# Altium PCB HackCube 2.PcbDoc
Units mm, origin at the board's own origin, x right, y up, seen from the top; angles counter-clockwise.
Board outline 30.4 x 57 mm, 2 copper layers (Top Layer, Bottom Layer); 7 components, 15 nets, 87 pads, 5 vias.
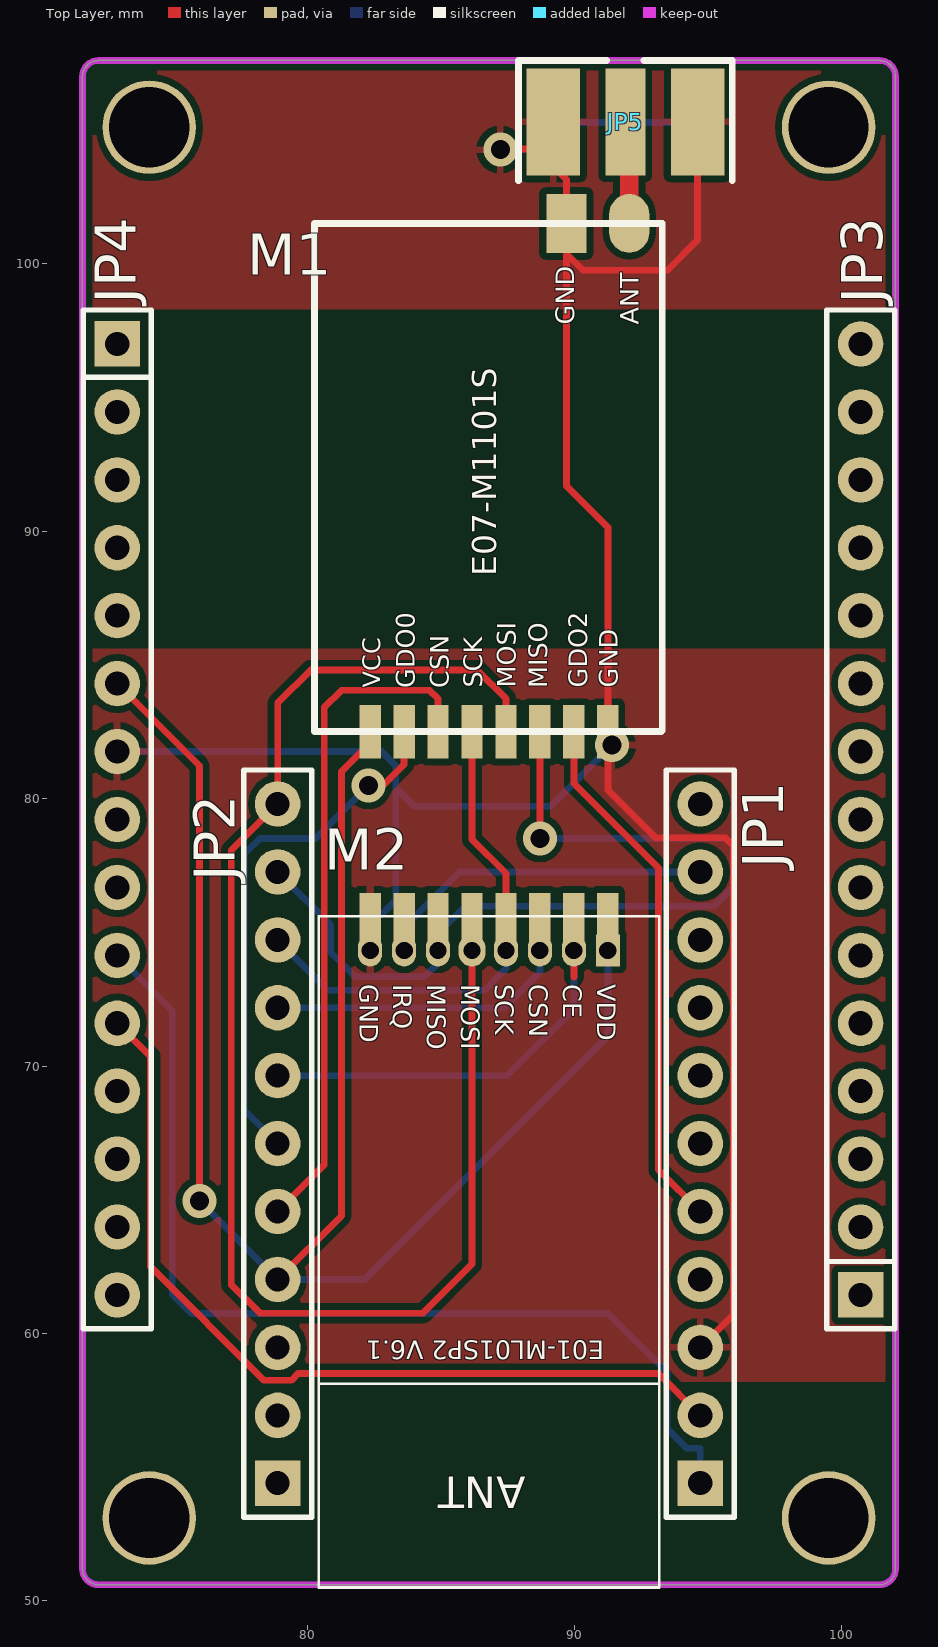
[diagram p0: Top Layer view]
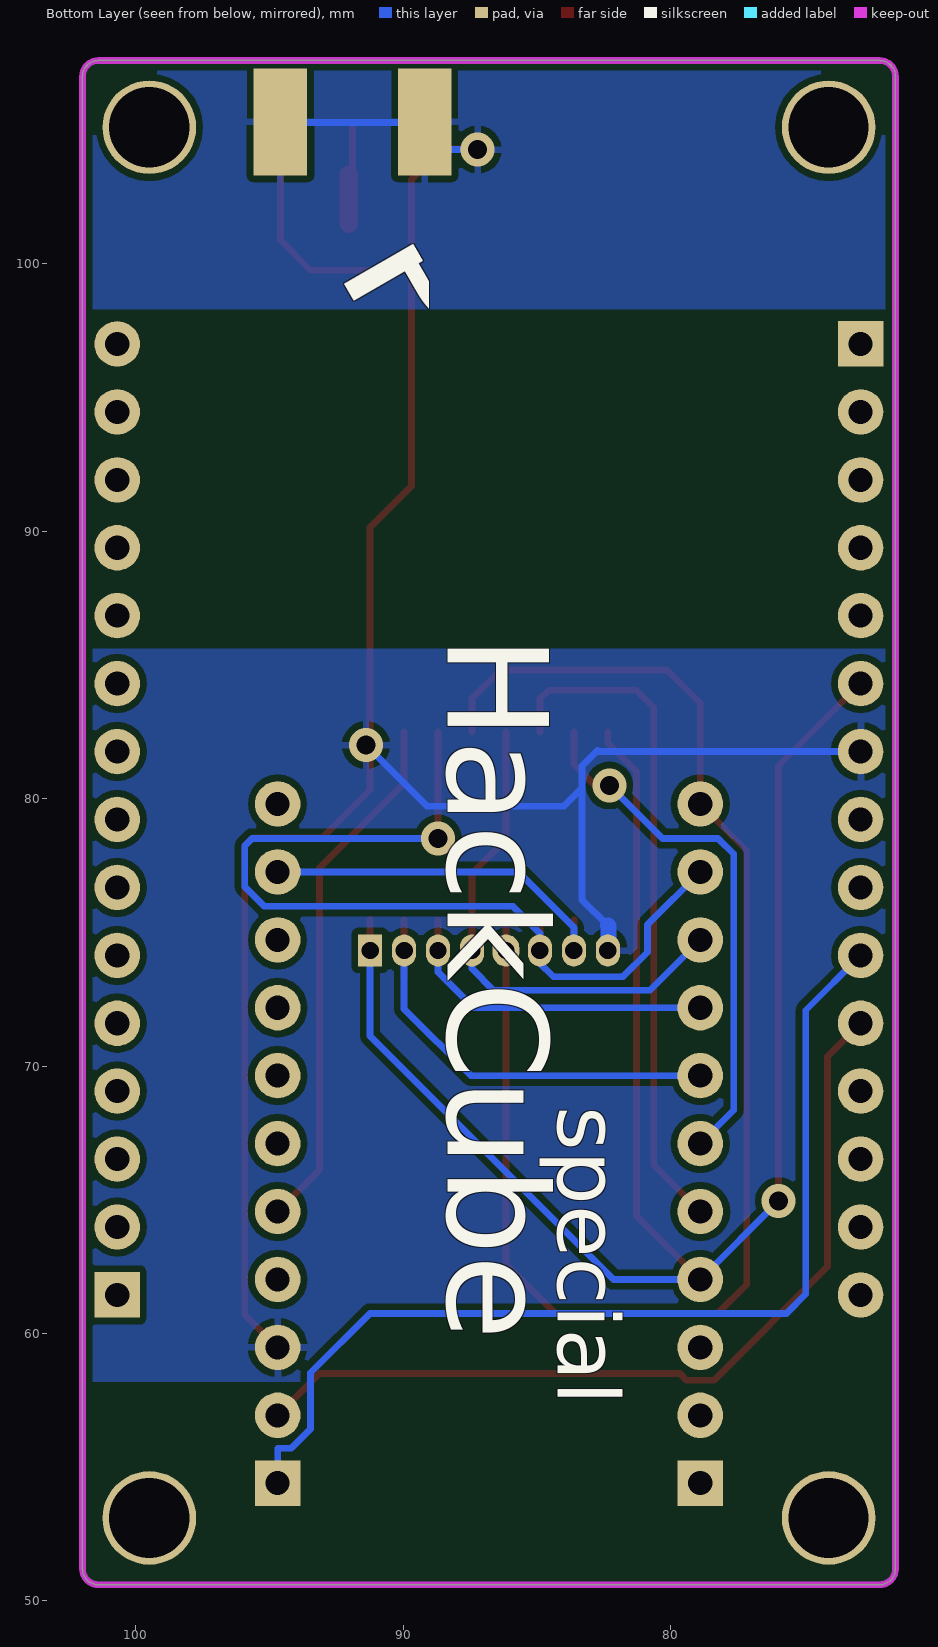
[diagram p1: Bottom Layer view, seen from below]

## Layer stack, top to bottom
Top Solder: solder mask 0.0102, Solder Resist, Dk 3.5
Top Layer: signal copper 0.0356
Dielectric 1: dielectric 0.32, FR-4, Dk 4.8
Bottom Layer: signal copper 0.0356
Bottom Solder: solder mask 0.0102, Solder Resist, Dk 3.5

## Board outline
71.6,51.2 71.6,107 cw(c72.2,107) 72.2,107.6 101.4,107.6 cw(c101.4,107) 102,107 102,51.2 cw(c101.4,51.2) 101.4,50.6 72.2,50.6 cw(c72.2,51.2)

## Design rules (kind name [scope] priority, off if disabled: settings)
Clearance [All] p1: gap=0.254 ignorepadtopadclearanceinfootprint=FALSE except(0: Arc-Hole Track-Hole SMDPad-Hole THPad-Hole Via-Hole Fill-Hole Poly-Hole Region-Hole Text-Hole)
PolygonConnect [All] p1: connectstyle=Relief reliefconductorwidth=0.254 reliefentries=4 polygonreliefangle="90 Angle" airgapwidth=0.254
RoutingVias [All] p1: holewidth=0.711 width=1.27 viastyle="Through Hole" minholewidth=0.711 minwidth=1.27 maxholewidth=0.711 maxwidth=1.27
SolderMaskExpansion [All] p1: expansion=0.102
Width [All] p1: maxlimit=0.254 minlimit=0.254 preferedwidth=0.254
30 further rules are at their usual default settings.

## Components (designator, comment, footprint, x,y, rotation, side; value= is the part's Value field where it differs from the comment)
JP1 "HDR-1X11" HDR2.54-LI-11P 94.7,67.1 r90 top
JP2 "HDR-1X11" HDR2.54-LI-11P 78.9,67.1 r90 top
JP3 "HDR-1X15" HDR2.54-LI-15P 100.7,79.22 r90 top
JP4 "HDR-1X15" HDR2.54-LI-15P 72.9,79.22 r270 top
JP5 "SMA WIFI 天线接口" SMA-KE 91.9,105.3 r0 top
M1 "CC1101_433Mhz" PE07-M1101S 87.2,92 r90 top
M2 "nRF24L01_2_4G" PE01-ML01SP2 86.8,67.6 r270 top

## Footprints (in the part's own frame and the unit in brackets; to place one, negate y for a bottom-side part, rotate by r counter-clockwise, add the part's x,y. Pads: shape width x height; smd on the part's side, far side on the other; paste and mask are expansions set on the pad)
HDR2.54-LI-11P [mm] "排针"
  rect 1.7x1.7 hole 0.9: 1(-12.7,0)
  round 1.7 hole 0.9: 2(-10.16,0) 3(-7.62,0) 4(-5.08,0) 5(-2.54,0) 6(0,0) 7(2.54,0) 8(5.08,0) 9(7.62,0) 10(10.16,0) 11(12.7,0)
  silkscreen extent -13.97,-1.27 13.97,1.27, body extent -13.97,-1.27 13.97,1.27, height 8.5
HDR2.54-LI-15P [mm] "排针，15脚"
  rect 1.7x1.7 hole 0.9: 1(-17.78,0)
  round 1.7 hole 0.9: 2(-15.24,0) 3(-12.7,0) 4(-10.16,0) 5(-7.62,0) 6(-5.08,0) 7(-2.54,0) 8(0,0) 9(2.54,0) 10(5.08,0) 11(7.62,0) 12(10.16,0) 13(12.7,0) 14(15.24,0) 15(17.78,0)
  silkscreen extent -19.05,-1.27 19.05,1.27, body extent -19.05,-1.27 19.05,1.27, height 8.5
PE01-ML01SP2 [mm] "25.1mm*12.8mm*2.10mm-S"
  rect 2x0.8 smd: 1(-7.874,4.445) 2(-7.873,3.175) 3(-7.873,1.905) 4(-7.873,0.635) 5(-7.873,-0.635) 6(-7.873,-1.905) 7(-7.873,-3.175) 8(-7.873,-4.445)
  rect 1.2x0.9 hole 0.65: 1(-6.721,4.445)
  oval 1.2x0.9 hole 0.65: 2(-6.721,3.175) 3(-6.721,1.905) 4(-6.721,0.635) 6(-6.721,-1.905) 7(-6.721,-3.175) 8(-6.721,-4.445)
  oval 1.2x1 hole 0.65: 5(-6.721,-0.635)
  Top Layer lines w0.22: -6.327,-0.472 cw(c-6.721,-0.077) -6.721,-0.635 ; -6.329,3.175 -6.404,3.175 ; -6.721,-0.635 ccw(c-6.748,-0.608) -6.72,-0.634 ; -6.721,-0.635 ccw(c-6.748,-0.608) -6.72,-0.634 ; -6.721,-0.635 ccw(c-6.748,-0.608) -6.72,-0.634 ; -6.721,-0.635 ccw(c-6.748,-0.608) -6.72,-0.634 ; -6.721,-0.635 ccw(c-6.748,-0.608) -6.72,-0.634 ; -6.721,-0.635 ccw(c-6.748,-0.608) -6.72,-0.634 ; -6.721,-0.635 ccw(c-6.748,-0.608) -6.72,-0.634 ; -6.721,-0.635 ccw(c-6.748,-0.608) -6.72,-0.634 ; -6.721,-0.635 ccw(c-6.748,-0.608) -6.72,-0.634 ; -6.721,-0.635 ccw(c-6.748,-0.608) -6.72,-0.634 ; -6.721,-0.635 ccw(c-6.748,-0.608) -6.72,-0.634 ; -6.721,-0.635 ccw(c-6.748,-0.608) -6.72,-0.634 ; -6.721,-0.635 ccw(c-6.748,-0.608) -6.72,-0.634 ; -6.721,-0.635 ccw(c-6.748,-0.608) -6.72,-0.634 ; -6.721,-0.635 ccw(c-6.748,-0.608) -6.72,-0.634 ; -6.721,-0.635 ccw(c-6.748,-0.608) -6.72,-0.634 ; -6.721,-0.635 ccw(c-6.748,-0.608) -6.72,-0.634 ; -6.721,-0.635 ccw(c-6.748,-0.608) -6.72,-0.634 ; -6.721,-0.635 ccw(c-6.748,-0.608) -6.72,-0.634 ; -6.721,-0.635 ccw(c-6.748,-0.608) -6.72,-0.634 ; -6.721,-0.635 ccw(c-6.748,-0.608) -6.72,-0.634 ; -6.721,-0.635 ccw(c-6.748,-0.608) -6.72,-0.634 ; -6.721,-0.635 ccw(c-6.748,-0.608) -6.72,-0.634 ; -6.721,-0.635 ccw(c-6.748,-0.608) -6.72,-0.634 ; -6.721,-0.635 ccw(c-6.748,-0.608) -6.72,-0.634 ; -6.721,-0.635 ccw(c-6.748,-0.608) -6.72,-0.634 ; -6.721,-0.635 ccw(c-6.748,-0.608) -6.72,-0.634 ; -6.721,-0.635 ccw(c-6.748,-0.608) -6.72,-0.634 ; -6.721,-0.635 ccw(c-6.748,-0.608) -6.72,-0.634 ; -6.721,-0.635 ccw(c-6.748,-0.608) -6.72,-0.634 ; -6.721,-0.635 ccw(c-6.748,-0.608) -6.72,-0.634 ; -6.721,-0.635 ccw(c-6.748,-0.608) -6.72,-0.634 ; -6.721,-0.635 -6.72,-0.634 ; -6.721,-0.635 -6.72,-0.634 ; -6.721,-0.635 -6.72,-0.634 ; -6.721,-0.635 -6.72,-0.634 ; -6.721,-0.635 -6.72,-0.634 ; -6.721,-0.635 -6.72,-0.634 ; -6.721,-0.635 -6.72,-0.634 ; -6.721,-0.635 -6.72,-0.634 ; -6.721,-0.635 -6.72,-0.634 ; -6.721,-0.635 -6.72,-0.634 ; -6.721,-0.635 -6.72,-0.634 ; -6.721,-0.635 -6.72,-0.634 ; -6.721,-0.635 -6.72,-0.634 ; -6.721,-0.635 -6.72,-0.634 ; -6.721,-0.635 -6.72,-0.634 ; -6.721,-0.635 -6.72,-0.634 ; -6.72,-0.634 ccw(c-6.748,-0.608) -6.71,-0.608 ; -6.72,-0.634 ccw(c-6.748,-0.608) -6.71,-0.608 ; -6.72,-0.634 ccw(c-6.748,-0.608) -6.71,-0.608 ; -6.72,-0.634 ccw(c-6.748,-0.608) -6.71,-0.608 ; -6.72,-0.634 ccw(c-6.748,-0.608) -6.71,-0.608 ; -6.72,-0.634 ccw(c-6.748,-0.608) -6.71,-0.608 ; -6.72,-0.634 ccw(c-6.748,-0.608) -6.71,-0.608 ; -6.72,-0.634 ccw(c-6.748,-0.608) -6.71,-0.608 ; -6.72,-0.634 ccw(c-6.748,-0.608) -6.71,-0.608 ; -6.72,-0.634 ccw(c-6.748,-0.608) -6.71,-0.608 ; -6.72,-0.634 ccw(c-6.748,-0.608) -6.71,-0.608 ; -6.72,-0.634 ccw(c-6.748,-0.608) -6.71,-0.608 ; -6.72,-0.634 ccw(c-6.748,-0.608) -6.71,-0.608 ; -6.72,-0.634 ccw(c-6.748,-0.608) -6.71,-0.608 ; -6.72,-0.634 ccw(c-6.748,-0.608) -6.71,-0.608 ; -6.72,-0.634 ccw(c-6.748,-0.608) -6.71,-0.608 ; -6.72,-0.634 ccw(c-6.748,-0.608) -6.71,-0.608 ; -6.72,-0.634 ccw(c-6.748,-0.608) -6.71,-0.608 ; -6.72,-0.634 ccw(c-6.748,-0.608) -6.71,-0.608 ; -6.72,-0.634 ccw(c-6.748,-0.608) -6.71,-0.608 ; -6.72,-0.634 ccw(c-6.748,-0.608) -6.71,-0.608 ; -6.72,-0.634 ccw(c-6.748,-0.608) -6.71,-0.608 ; -6.72,-0.634 ccw(c-6.748,-0.608) -6.71,-0.608 ; -6.72,-0.634 ccw(c-6.748,-0.608) -6.71,-0.608 ; -6.72,-0.634 ccw(c-6.748,-0.608) -6.71,-0.608 ; -6.72,-0.634 ccw(c-6.748,-0.608) -6.71,-0.608 ; -6.72,-0.634 ccw(c-6.748,-0.608) -6.71,-0.608 ; -6.72,-0.634 ccw(c-6.748,-0.608) -6.71,-0.608 ; -6.72,-0.634 ccw(c-6.748,-0.608) -6.71,-0.608 ; -6.72,-0.634 ccw(c-6.748,-0.608) -6.71,-0.608 ; -6.72,-0.634 ccw(c-6.748,-0.608) -6.71,-0.608 ; -6.72,-0.634 ccw(c-6.748,-0.608) -6.71,-0.608 ; -6.72,-0.634 -6.653,-0.567 ; -6.72,-0.634 -6.653,-0.567 ; -6.72,-0.634 -6.653,-0.567 ; -6.72,-0.634 -6.653,-0.567 ; -6.72,-0.634 -6.653,-0.567 ; -6.72,-0.634 -6.653,-0.567 ; -6.72,-0.634 -6.653,-0.567 ; -6.72,-0.634 -6.653,-0.567 ; -6.72,-0.634 -6.653,-0.567 ; -6.72,-0.634 -6.653,-0.567 ; -6.72,-0.634 -6.653,-0.567 ; -6.72,-0.634 -6.653,-0.567 ; -6.72,-0.634 -6.653,-0.567 ; -6.72,-0.634 -6.653,-0.567 ; -6.72,-0.634 -6.653,-0.567 ; -6.72,-0.634 -6.653,-0.567 ; -6.71,-0.608 cw(c-6.662,-0.56) -6.73,-0.56 ; -6.71,-0.608 cw(c-6.662,-0.56) -6.73,-0.56 ; -6.73,-0.56 -6.73,-0.255 -6.73,-0.56 ; -6.721,0.635 cw(c-6.6,0.514) -6.721,0.635 ; -6.721,0.635 cw(c-6.6,0.514) -6.721,0.635 ; -6.721,0.635 cw(c-6.6,0.514) -6.721,0.635 ; -6.721,0.635 cw(c-6.6,0.514) -6.721,0.635 ; -6.721,0.635 cw(c-6.6,0.514) -6.721,0.635 ; -6.721,0.635 cw(c-6.6,0.514) -6.721,0.635 ; -6.721,0.635 cw(c-6.6,0.514) -6.721,0.635 ; -6.721,0.635 cw(c-6.6,0.514) -6.721,0.635 ; -6.721,0.635 cw(c-6.6,0.514) -6.721,0.635 ; -6.721,0.635 cw(c-6.6,0.514) -6.721,0.635 ; -6.721,0.635 cw(c-6.6,0.514) -6.721,0.635 ; -6.721,0.635 cw(c-6.6,0.514) -6.721,0.635 ; -6.721,0.635 cw(c-6.6,0.514) -6.721,0.635 ; -6.721,0.635 cw(c-6.6,0.514) -6.721,0.635 ; -6.721,0.635 cw(c-6.6,0.514) -6.721,0.635 ; -6.721,0.635 cw(c-6.6,0.514) -6.721,0.635 ; -6.721,0.635 -6.721,0.635 ; -6.721,0.635 -6.721,0.635 ; -6.721,0.635 -6.721,0.635 ; -6.721,0.635 -6.721,0.635 ; -6.721,0.635 -6.721,0.635 ; -6.721,0.635 -6.721,0.635 ; -6.721,0.635 -6.721,0.635 ; -6.721,0.635 -6.721,0.635 ; -6.721,0.635 -6.721,0.635 ; -6.721,0.635 -6.721,0.635 ; -6.721,0.635 -6.721,0.635 ; -6.721,0.635 -6.721,0.635 ; -6.721,0.635 -6.721,0.635 ; -6.721,0.635 -6.721,0.635 ; -6.721,0.635 -6.721,0.635 ; -6.721,0.635 -6.721,0.635 ; -6.721,0.635 cw(c-6.6,0.514) -6.6,0.685 ; -6.721,0.635 cw(c-6.6,0.514) -6.6,0.685 ; -6.721,0.635 cw(c-6.6,0.514) -6.6,0.685 ; -6.721,0.635 cw(c-6.6,0.514) -6.6,0.685 ; -6.721,0.635 cw(c-6.6,0.514) -6.6,0.685 ; -6.721,0.635 cw(c-6.6,0.514) -6.6,0.685 ; -6.721,0.635 cw(c-6.6,0.514) -6.6,0.685 ; -6.721,0.635 cw(c-6.6,0.514) -6.6,0.685 ; -6.721,0.635 cw(c-6.6,0.514) -6.6,0.685 ; -6.721,0.635 cw(c-6.6,0.514) -6.6,0.685 ; -6.721,0.635 cw(c-6.6,0.514) -6.6,0.685 ; -6.721,0.635 cw(c-6.6,0.514) -6.6,0.685 ; -6.721,0.635 cw(c-6.6,0.514) -6.6,0.685 ; -6.721,0.635 cw(c-6.6,0.514) -6.6,0.685 ; -6.721,0.635 cw(c-6.6,0.514) -6.6,0.685 ; -6.721,0.635 cw(c-6.6,0.514) -6.6,0.685 ; -6.721,0.635 -6.671,0.685 ; -6.721,0.635 -6.671,0.685 ; -6.721,0.635 -6.671,0.685 ; -6.721,0.635 -6.671,0.685 ; -6.721,0.635 -6.671,0.685 ; -6.721,0.635 -6.671,0.685 ; -6.721,0.635 -6.671,0.685 ; -6.721,0.635 -6.671,0.685 ; -6.721,0.635 -6.671,0.685 ; -6.721,0.635 -6.671,0.685 ; -6.721,0.635 -6.671,0.685 ; -6.721,0.635 -6.671,0.685 ; -6.721,0.635 -6.671,0.685 ; -6.721,0.635 -6.671,0.685 ; -6.721,0.635 -6.671,0.685 ; -6.721,0.635 -6.671,0.685 ; -6.404,3.175 -6.721,3.175 -6.404,3.175
  Bottom Layer lines w0.6: -6.721,-4.445 -6.751,-4.475 -7.62,-4.475 -7.65,-4.445
  silkscreen extent -8,-6.36 17.1,6.37
PE07-M1101S [mm]
  rect 2x0.8 smd: 1(-9.507,4.845) 2(-9.507,3.575) 3(-9.507,2.305) 4(-9.507,1.035) 5(-9.507,-0.235) 6(-9.507,-1.505) 7(-9.507,-2.775) 8(-9.507,-4.045)
  oval 2.2x1.5 smd: 9(9.508,-4.845)
  rect 2.2x1.5 smd: 10(9.508,-2.495)
  silkscreen extent -9.49,-6.08 9.51,6.92
SMA-KE [mm] "SMA 偏脚射频天线座"
  rect 1.5x4 smd: 1(0,0)
  rect 2x4 smd: 2(-2.7,0) 2(2.7,0)
  rect 2x4 smd far side: 3(-2.7,0) 3(2.7,0)
  silkscreen extent -4,-2.2 4,2.3, body extent -3.25,-1.3 3.25,12.2, height 3.75

## Part data
JP1 JP2: library part "Header 11", "11P接插件", BOM名称=11P接插件, 学习资源=www.ooocke.com, 版权归属=源创客
JP3 JP4: library part "Header 15", "15P接插件", BOM名称=15P接插件, 学习资源=www.ooocke.com, 版权归属=源创客
JP5: library part SMA, "SMA-2.4G射频天线接口", BOM名称=SMA-2.4G射频天线接口, 学习资源=www.ooocke.com, 版权归属=源创客

## Free pads (board coordinates)
  round 3.5 hole 3: 12(74.1,105.1) 13(99.5,105.1) 14(74.1,53.1) 15(99.5,53.1)

## Via types
v1: diameter 1.27, hole 0.711, Top Layer to Bottom Layer, 5 vias

## Nets (pads, with @x,y where several pads share a name; then routed paths per layer and width w, separated by ;. In a path a pad name is that pad's centre, name@x,y a point inside that pad or via, vN(x,y) a via of type N, cw(c..) or ccw(c..) an arc to the next point about the centre after c; other vN are vias at no path point)
2_4_CE: JP2.7 M2.2 | length 16.4
  Top Layer w0.254: 89.975,73.33 89.975,73.929 89.975,74.004 89.975,74.321 M2.2@89.975,75.473
  Bottom Layer w0.254: JP2.7 87.479,69.64 89.975,72.136 M2.2@89.975,74.321
2_4_CSN: JP2.8 M2.3 | length 12.3
  Top Layer w0.254: M2.3@88.705,74.321 M2.3@88.705,75.473
  Bottom Layer w0.254: JP2.8 87.376,72.18 88.705,73.509 M2.3@88.705,74.321
2_4_IRQ: JP1.10 M2.7 | length 13.9
  Top Layer w0.254: M2.7@83.625,74.321 M2.7@83.625,75.473
  Bottom Layer w0.254: M2.7@83.625,74.321 83.625,75.184 85.701,77.26 JP1.10
3V3: JP2.4 JP4.6 M1.1 M2.1 | length 67.1
  Top Layer w0.254: JP4.6 75.971,81.229 v1(75.971,64.949) ; JP2.4 81.28,64.4 81.28,81.011 82.355,82.086 M1.1 ; M2.1@91.245,74.321 M2.1@91.245,75.474
  Bottom Layer w0.254: v1(75.971,64.949) JP2.4 82.145,62.02 91.245,71.12 M2.1@91.245,74.321
433_CSN: JP2.5 M1.3 | length 25.5
  Top Layer w0.254: JP2.5 80.639,66.299 80.639,83.408 81.28,84.049 84.582,84.049 84.895,83.735 M1.3
433_GDO0: JP2.6 M1.2 | length 19.9
  Top Layer w0.254: v1(82.296,80.493) 82.838,80.493 83.625,81.28 M1.2
  Bottom Layer w0.254: JP2.6 77.648,68.352 77.648,77.927 78.232,78.511 80.315,78.511 v1(82.296,80.493)
433_GDO2: JP1.5 M1.7 | length 19.9
  Top Layer w0.254: M1.7 89.975,80.569 93.142,77.402 93.142,66.118 JP1.5
GND: JP1.3 JP4.7 JP5.2 JP5.3 M1.8 M1.10 M2.8 | length 97.4
  Top Layer w0.254: v1(87.224,104.267) 87.249,104.292 JP5.2@89.2,104.292 ; JP5.2@89.2,105.3 JP5.2@89.2,104.292 ; JP5.2@94.6,105.3 94.6,100.884 93.472,99.756 90.312,99.756 89.695,100.374 ; JP1.3 95.936,60.716 95.936,78.232 95.631,78.537 93.023,78.537 91.245,80.315 M1.8 91.245,90.143 89.695,91.694 89.695,100.374 ; JP5.2@89.2,104.292 89.2,103.644 89.695,103.149 M1.10 89.695,100.374
  Bottom Layer w0.254: JP4.7 82.7,81.76 ; 82.355,75.25 83.317,76.212 83.317,80.4 ; 82.739,81.799 83.317,81.22 83.317,80.4 ; v1(87.224,104.267) 89.2,104.267 JP5.3@89.2,105.283 ; JP5.3@89.2,105.3 JP5.3@89.2,105.283 ; v1(91.4,82) 89.117,79.717 84,79.717 83.317,80.4 ; JP5.3@94.6,105.3 94.6,105.283 JP5.3@89.2,105.283
LED: JP4.3
MISO: JP2.10 M1.6 M2.6 | length 35.3
  Top Layer w0.254: M2.6@84.895,74.321 M2.6@84.895,75.473 ; v1(88.705,78.511) M1.6
  Bottom Layer w0.254: JP2.10 80.874,75.286 80.874,74.254 81.788,73.34 84.397,73.34 84.895,73.838 84.895,74.321 84.895,74.964 85.903,75.971 95.199,75.971 95.936,76.708 95.936,78.232 95.656,78.511 v1(88.705,78.511)
MOSI: JP2.11 M1.5 M2.5 | length 56.3
  Top Layer w0.254: M2.5@86.165,75.473 86.165,74.321 86.165,62.594 84.328,60.757 78.232,60.757 77.161,61.828 77.161,78.061 JP2.11 78.9,83.574 80.137,84.811 86.36,84.811 87.435,83.735 M1.5
NetJP5_1: JP5.1 M1.9 | length 3.9
  Top Layer w0.254: JP5.1 91.9,103.472 JP5.1@92.045,103.327
  Top Layer w0.7: M1.9 JP5.1@92.045,103.327
RX: JP1.2 JP4.11 | length 32.7
  Top Layer w0.254: JP4.11 74.143,70.357 74.143,62.497 78.39,58.249 79.41,58.249 79.661,58.5 93.14,58.5 JP1.2
SCK: JP2.9 M1.4 M2.4 | length 19
  Top Layer w0.254: M1.4 86.165,78.477 87.435,77.208 87.435,75.473 M2.4@87.435,74.321
  Bottom Layer w0.254: JP2.9 80.788,72.832 86.624,72.832 87.435,73.643 M2.4@87.435,74.321
TX: JP1.1 JP4.10 | length 38.2
  Bottom Layer w0.254: JP4.10 74.955,72.085 74.955,61.468 75.673,60.75 91.25,60.75 93.469,58.531 93.469,56.43 94.19,55.709 94.7,55.709 JP1.1
pads on no net: JP1.4 JP1.6 JP1.7 JP1.8 JP1.9 JP1.11 JP2.1 JP2.2 JP2.3 JP3.1 JP3.2 JP3.3 JP3.4 JP3.5 JP3.6 JP3.7 JP3.8 JP3.9 JP3.10 JP3.11 JP3.12 JP3.13 JP3.14 JP3.15 JP4.1 JP4.2 JP4.4 JP4.5 JP4.8 JP4.9 JP4.12 JP4.13 JP4.14 JP4.15

## Polygon pours and split planes (outlines as drawn)
GND on Bottom Layer "Top ayer-GND" (solid, remove dead copper, pour order 12): 69.1,85.6 109.1,85.6 109.1,62.5 104.7,58.1 104.6,58.2 66.1,58.2
GND on Bottom Layer "Top ayer-GND" (solid, remove dead copper, pour order 8): 69.4,108.5 107.5,108.5 107.5,103.2 102.5,98.2 102.4,98.3 68.7,98.3
GND on Top Layer "Top ayer-GND" (solid, remove dead copper, pour order 14): 69,85.6 105.2,85.6 106.5,84.3 104.5,82.3 104.5,58.2 71.9,58.2 66.1,64
GND on Top Layer "Top ayer-GND" (solid, remove dead copper, pour order 10): 70.6,108.4 106.5,108.4 106.7,108.2 102.9,104.4 102.9,98.3 70.8,98.3 69,100.1

## Keep-outs
Keep-Out Layer:
  the board outline again, w0.254

## Silkscreen, mask and mechanical layers (free items; w line width, h text height)
Bottom Overlay:
  text "P" at 96.2,97.8 h22 r60
  text "HackCube" at 89.6,86.1 h6.5 r90
  text "special" at 85,68.5 h4 r90

## Text inside footprints (layer, text, board x,y; h text height)
M1: Top Overlay "GND" at 91.619,84.147 h0.7 r90; Top Overlay "GDO2" at 90.476,84.147 h0.7 r90; Top Overlay "MISO" at 88.978,84.126 h0.7 r90; Top Overlay "MOSI" at 87.809,84.147 h0.7 r90; Top Overlay "SCK" at 86.539,84.147 h0.7 r90; Top Overlay "CSN" at 85.295,84.126 h0.7 r90; Top Overlay "GDO0" at 84.025,84.126 h0.7 r90; Top Overlay "VCC" at 82.729,84.147 h0.65 r90; Top Overlay "E07-M1101S" at 87.073,88.317 h0.9 r90; Top Overlay "ANT" at 92.407,97.715 h0.7 r90; Top Overlay "GND" at 89.994,97.715 h0.7 r90
M2: Top Overlay "GND" at 81.959,73.06 h0.7 r270; Top Overlay "IRQ" at 83.229,73.06 h0.7 r270; Top Overlay "MISO" at 84.499,73.06 h0.7 r270; Top Overlay "MOSI" at 85.769,73.06 h0.7 r270; Top Overlay "SCK" at 87.039,73.06 h0.7 r270; Top Overlay "CSN" at 88.309,73.06 h0.7 r270; Top Overlay "CE" at 89.579,73.06 h0.7 r270; Top Overlay "VDD" at 90.849,73.06 h0.7 r270; Top Overlay "E01-ML01SP2 V6.1" at 91.118,59.726 h0.7 r180; Top Overlay "ANT" at 88.182,55.026 h2 r180